# Altium PCB driver-FPGA.PcbDoc
Units mm, origin at the board's own origin, x right, y up, seen from the top; angles counter-clockwise.
Board outline 152.4 x 101.6 mm, 2 copper layers (Top Layer, Bottom Layer); 44 components, 27 nets, 144 pads, 54 vias.
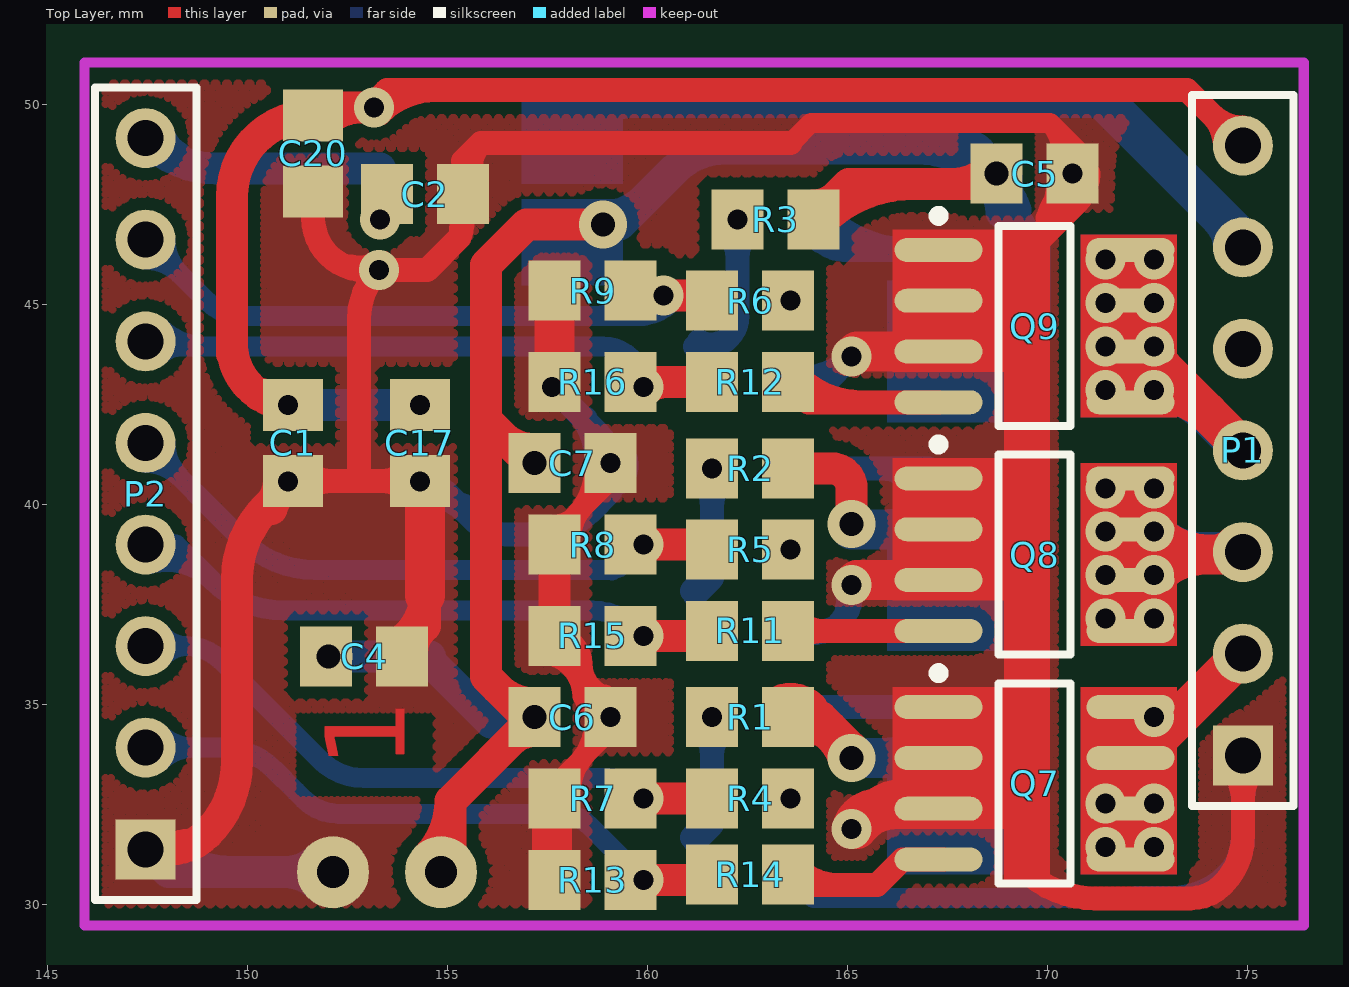
[diagram p0: Top Layer view]
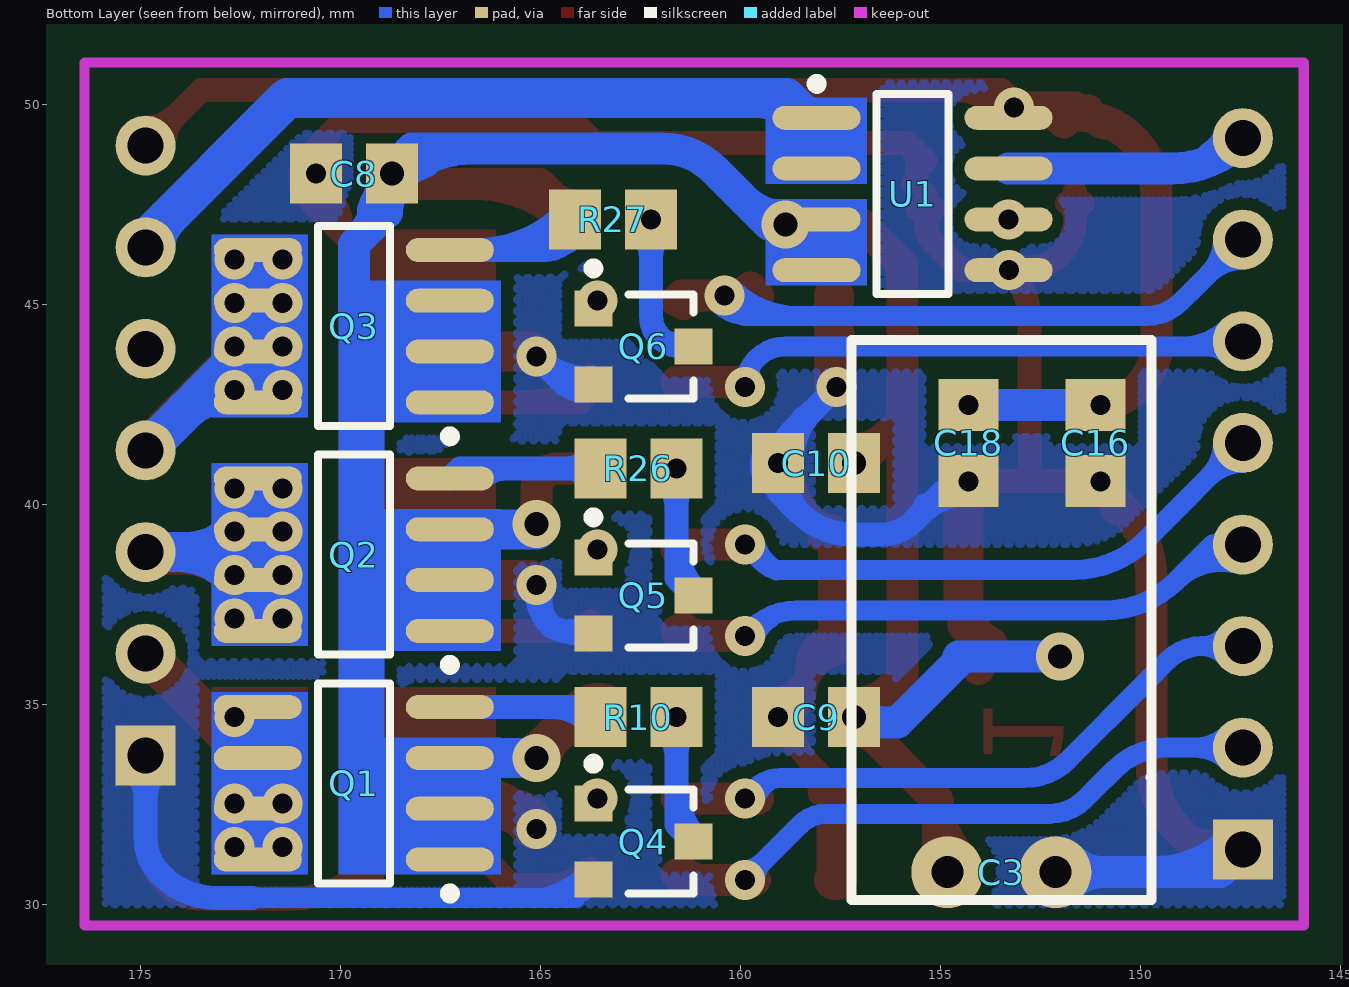
[diagram p1: Bottom Layer view, seen from below]

## Layer stack, top to bottom
Top Layer: signal copper 0.0356
Dielectric: dielectric 0.32, FR-4, Dk 4.8
Bottom Layer: signal copper 0.0356

## Board outline
25.4,25.4 177.8,25.4 177.8,127 25.4,127

## Design rules (kind name [scope] priority, off if disabled: settings)
Clearance Clearance_1 [InPolygon] p1: gap=0.3
Clearance [All] p2: gap=0.2
PolygonConnect [All] p1: connectstyle=Direct reliefconductorwidth=0.254 reliefentries=4 polygonreliefangle="90 Angle" airgapwidth=0.254
RoutingVias [All] p1: holewidth=0.5 width=1 viastyle="Through Hole" minholewidth=0.5 minwidth=1 maxholewidth=0.6 maxwidth=1.2
SolderMaskExpansion [All] p1: expansion=0.102
Width [All] p1: maxlimit=2 minlimit=0.2 preferedwidth=0.6 minimp=50.000000 maximp=50.000000 favimp=50.000000
28 further rules are at their usual default settings.

## Components (designator, comment, footprint, x,y, rotation, side; value= is the part's Value field where it differs from the comment)
C1 "Cap_UP" 2012[0805] 151.13,41.529 r270 top
C2 "Cap_UP" 2012[0805] 154.432,47.752 r0 top
C3 "Cap_El_200V" Cap1000u-16 149.733,30.099 r90 bottom locked
C4 "Cap_UP" 2012[0805] 152.908,36.195 r180 top
C5 "Cap_UP" 2012[0805] 169.672,48.26 r180 top
C6 "Cap_UP" 2012[0805] 158.115,34.671 r180 top
C7 "Cap_UP" 2012[0805] 158.115,41.021 r180 top
C8 "Cap_UP" 2012[0805] 169.672,48.26 r180 bottom
C9 "Cap_UP" 2012[0805] 158.115,34.671 r180 bottom
C10 "Cap_UP" 2012[0805] 158.115,41.021 r180 bottom
C16 "Cap_UP" 2012[0805] 151.13,41.529 r90 bottom
C17 "Cap_UP" 2012[0805] 154.305,41.529 r90 top
C18 "Cap_UP" 2012[0805] 154.305,41.529 r90 bottom
C20 "Cap_UP" 2012[0805] 151.638,48.768 r90 top
P1 "Header 7" HDR1X7 174.879,33.72 r90 top
P2 "Header 8" HDR1X8 147.447,31.369 r90 top
Q1 "MOSFET-P-8PIN" SO-8_N 169.672,33.02 r0 bottom
Q2 "MOSFET-P-8PIN" SO-8_N 169.672,38.735 r0 bottom
Q3 "MOSFET-P-8PIN" SO-8_N 169.672,44.45 r0 bottom
Q4 "2N2222" SOT-23 162.435,31.56 r270 bottom
Q5 "2N2222" SOT-23 162.433,37.719 r270 bottom
Q6 "2N2222" SOT-23 162.433,43.942 r270 bottom
Q7 "MOSFET-N-8PIN" SO-8_N 169.672,33.02 r0 top
Q8 "MOSFET-N-8PIN" SO-8_N 169.672,38.735 r0 top
Q9 "MOSFET-N-8PIN" SO-8_N 169.672,44.45 r0 top
R1 "Res" 2012[0805] 162.56,34.671 r0 top
R2 "Res" 2012[0805] 162.56,40.894 r0 top
R3 "Res" 2012[0805] 163.195,47.117 r0 top
R4 "Res" 2012[0805] 162.56,32.639 r180 top
R5 "Res" 2012[0805] 162.56,38.862 r180 top
R6 "Res" 2012[0805] 162.56,45.085 r180 top
R7 "Res" 2012[0805] 158.623,32.639 r0 top
R8 "Res" 2012[0805] 158.623,38.989 r0 top
R9 "Res" 2012[0805] 158.623,45.339 r0 top
R10 "Res" 2012[0805] 162.56,34.671 r0 bottom
R11 "Res" 2012[0805] 162.56,36.83 r0 top
R12 "Res" 2012[0805] 162.56,43.053 r0 top
R13 "Res" 2012[0805] 158.623,30.607 r0 top
R14 "Res" 2012[0805] 162.56,30.734 r0 top
R15 "Res" 2012[0805] 158.623,36.703 r0 top
R16 "Res" 2012[0805] 158.623,43.053 r0 top
R26 "Res" 2012[0805] 162.56,40.894 r0 bottom
R27 "Res" 2012[0805] 163.195,47.117 r0 bottom
U1 "ACS712" "8 pin SOIC_N" 155.702,47.752 r180 bottom

## Footprints (in the part's own frame and the unit in brackets; to place one, negate y for a bottom-side part, rotate by r counter-clockwise, add the part's x,y. Pads: shape width x height; smd on the part's side, far side on the other; paste and mask are expansions set on the pad)
"8 pin SOIC_N" [mm] "8-Pin Small Outline Integrated Circuit 1.27 mm Pitch, IPC Medium Density"
  oval 2.2x0.6 smd: 1(-2.4,1.905) 2(-2.4,0.635) 3(-2.4,-0.635) 4(-2.4,-1.905) 5(2.4,-1.905) 6(2.4,-0.635) 7(2.4,0.635) 8(2.4,1.905)
  silkscreen extent -2.53,-2.5 0.9,2.88, body extent -1.95,-2.45 1.95,2.45, height 1.91
2012[0805] [mm] "Chip Resistor; Body 2.0 x 1.3 mm (LxW typ)"
  rect 1.3x1.5 smd: 1(-0.95,0) 2(0.95,0)
  body extent -1.22,-0.75 1.28,0.75, height 0.5
Cap1000u-16 [mm] "Capacitor, SM Tantalum; Body 7.3 x 4.3 mm (LxW typ)"
  round 1.8 hole 0.8: 1(0.7,2.4) 2(0.7,5.1)
  silkscreen extent 0,0 14,7.5
HDR1X7 [mm]
  rect 1.5x1.5 hole 0.9: 1(0,0)
  round 1.5 hole 0.9: 2(2.54,0) 3(5.08,0) 4(7.62,0) 5(10.16,0) 6(12.7,0) 7(15.24,0)
  silkscreen extent -1.27,-1.27 16.51,1.27
HDR1X8 [mm]
  rect 1.5x1.5 hole 0.9: 1(0,0)
  round 1.5 hole 0.9: 2(2.54,0) 3(5.08,0) 4(7.62,0) 5(10.16,0) 6(12.7,0) 7(15.24,0) 8(17.78,0)
  silkscreen extent -1.27,-1.27 19.05,1.27
SO-8_N [mm] "8-Pin Small Outline Integrated Circuit 1.27 mm Pitch, IPC Medium Density"
  oval 2.2x0.6 smd: 1(-2.4,1.905) 2(-2.4,0.635) 3(-2.4,-0.635) 4(-2.4,-1.905) 5(2.4,-1.905) 6(2.4,-0.635) 7(2.4,0.635) 8(2.4,1.905)
  silkscreen extent -2.52,-2.5 0.9,2.88, body extent -1.95,-2.45 1.95,2.45, height 1.75
SOT-23 [mm] "SOT-23; 3 Leads; Body 3.0 x 2.6 mm, inc. leads (LxW max)"
  rect 0.9x0.95 smd: 1(0,1.25) 2(-0.95,-1.25) 3(0.95,-1.25)
  silkscreen extent -2.07,-1.38 1.3,1.25, body extent -1.33,-0.38 1.33,1.25, height 2

## Part data
C1 C2 C3 C4 C5 C6 C7 C8 C9 C10 C16 C17 C18 C20: "Capacitor"
P1: "Header, 7-Pin"
P2: "Header, 8-Pin"
Q1 Q2 Q3: "P-Channel MOSFET"
Q4 Q5 Q6: "NPN Bipolar Transistor"
Q7 Q8 Q9: "N-Channel MOSFET"
R1 R2 R3 R4 R5 R6 R7 R8 R9 R10 R11 R12 R13 R14 R15 R16 R26 R27: "Semiconductor Resistor"

## Via types
v1: diameter 1, hole 0.5, Top Layer to Bottom Layer, 47 vias
v2: diameter 1.2, hole 0.6, Top Layer to Bottom Layer, 7 vias

## Nets (pads, with @x,y where several pads share a name; then routed paths per layer and width w, separated by ;. In a path a pad name is that pad's centre, name@x,y a point inside that pad or via, vN(x,y) a via of type N, cw(c..) or ccw(c..) an arc to the next point about the centre after c; other vN are vias at no path point)
AGND: C1.2 C2.2 C3.1 C4.1 C5.1 C6.1 C7.1 C8.1 C9.1 C10.1 C16.1 C17.1 C18.1 C20.1 P1.1 P2.1 Q4.3 Q5.3 Q6.3 Q7.1 Q7.2 Q7.3 Q8.1 Q8.2 Q8.3 Q9.1 Q9.2 Q9.3 R7.1 R8.1 R9.1 R13.1 R15.1 R16.1 U1.5 | length 178.2
  Top Layer w0.5: R15.1@157.572,36.216 cw(c157.303,35.185) 158.369,35.185 ; R7.1 157.673,32.959 C6.1@159.065,34.351 ; R15.1 cw(c157.673,36.007) 158.369,36.007 ; R8.1@157.673,39.202 C7.1@159.065,40.594 ; R8.1@157.673,39.489 ccw(c157.673,40.182) R8.1@158.163,39.692 ; R15.1@157.698,36.7 cw(c157.472,35.832) 158.369,35.832 ; R7.1@158.073,32.739 cw(c159.57,32.739) 158.511,33.797 ; R8.1@158.073,39.089 cw(c159.311,39.089) 158.436,39.964 ; R8.1@158.151,39.68 ccw(c156.909,40.921) C7.1@158.665,40.921 ; 158.227,33.513 ccw(c157.168,34.571) C6.1@158.665,34.571 ; 158.336,39.865 ccw(c157.18,41.021) C7.1@158.815,41.021 ; 158.369,35.443 ccw(c159.146,35.443) C6.1@159.053,34.672 ; 158.412,33.698 ccw(c157.439,34.671) C6.1@158.815,34.671 ; C6.1@158.929,35.242 cw(c158.7,34.671) C6.1@159.315,34.671 ; v1(159.065,34.671) cw(c159.065,35.367) 158.369,35.367 158.369,36.007 ; C6.1@159.113,35.168 cw(c159.214,36.007) 158.369,36.007 ; 163.576,49.022 164.084,49.53 170.053,49.53 ; C5.1@170.253,48.514 ccw(c169.396,48.873) 170.053,49.53 ; 170.329,49.071 ccw(c170.849,49.001) C5.1@170.695,48.499 ; C5.1@170.38,48.323 ccw(c169.164,48.641) 170.053,49.53 ; C5.1@170.67,48.913 cw(c170.142,48.386) C5.1@170.864,48.197 ; C5.1@170.749,48.834 170.053,49.53
  Top Layer w0.6: C1.2 152.654,40.579 ; C1.2@151.144,40.425 cw(c151.517,40.052) C1.2@151.517,40.579 ; C20.1@151.438,47.531 cw(c151.171,47.148) 151.638,47.148 ; C1.2@151.477,40.332 cw(c152.075,39.734) 152.075,40.579 cw(c152.075,41.424) C1.2@151.477,40.826 ; C20.1 151.638,47.148 ; C20.1@151.838,47.531 ccw(c152.105,47.148) 151.638,47.148 ; 152.588,45.941 ccw(c152.793,46.706) v1@153.189,46.02 ; C17.1@153.791,40.579 cw(c153.791,40.052) C17.1@154.164,40.425 ; C17.1@153.958,40.332 ccw(c153.36,39.734) 153.36,40.579 ccw(c153.36,41.424) C17.1@153.958,40.826 ; C17.1@154.432,40.566 ccw(c154.401,40.535) 154.401,40.579 C17.1 152.654,40.579 ; C2.2@155.155,47.386 cw(c154.808,46.98) 155.334,46.89 ; 155.353,47.001 cw(c155.909,46.905) C2.2@155.584,47.366 ; C2.2 155.382,47.168 cw(c153.873,47.168) 155.294,46.662 154.48,45.847 v1(153.289,45.847) ; 155.382,48.575 155.829,49.022 ; C2.2@155.688,48.022 cw(c156.423,48.428) 155.829,49.022 ; 163.576,49.022 155.829,49.022 ; 169.291,30.988 169.39,30.889 ccw(c171.186,32.685) 171.186,30.145 173.562,30.145 ccw(c173.562,31.289) 174.371,30.48 ccw(c173.145,31.706) 174.879,31.706 P1.1 ; 169.418,46.228 170.749,47.559 C5.1@170.749,48.26 ; 169.51,46.32 ccw(c167.669,48.16) C5.1@170.272,48.16 ; 169.695,46.505 ccw(c167.94,48.26) C5.1@170.422,48.26 ; 170,47.146 cw(c171.496,46.746) C5.1@170.722,48.087 ; C5.1@170.492,48.108 cw(c170.01,47.548) C5.1@170.749,47.548 ; 170.534,47.344 ccw(c169.718,48.16) C5.1@170.872,48.16 ; v1(170.622,48.26) C5.1@170.622,48.834 ; C5.1@170.719,47.529 ccw(c169.989,48.26) C5.1@171.022,48.26 ; P1.1@174.561,33.402 cw(c173.793,32.634) 174.879,32.634 cw(c175.965,32.634) P1.1@175.197,33.402 ; 151.638,47.148 ccw(c152.939,47.148) 152.019,46.228 ccw(c152.939,47.148) 152.939,45.847 v1(153.289,45.847) ; 152.654,40.579 ccw(c152.347,40.886) 152.781,40.886 152.781,44.621 cw(c154.515,44.621) v1(153.289,45.847)
  Top Layer w0.8: P2.1 148.051,31.369 ccw(c148.051,32.67) 148.971,31.75 148.989,31.768 ccw(c147.193,33.564) 149.733,33.564 149.733,38.13 cw(c152.273,38.13) 150.477,39.926 C1.2 ; P2.1@147.669,31.64 ccw(c148.217,32.307) 148.44,31.473 ; C1.2@150.533,39.982 ccw(c149.935,40.579) C1.2@150.78,40.579 ; 150.593,39.879 cw(c151.547,39.623) C1.2@151.053,40.479 ; C4.1@153.733,36.512 ccw(c153.04,37.719) 154.432,37.719 154.432,36.957 153.858,36.383 C4.1 ; C4.1@154.051,35.875 C4.1@154.051,36.388 ; C4.1@154.108,36.295 cw(c154.924,36.295) C4.1@154.347,36.872 ; R15.1 R8.1
  Top Layer w1: 154.432,37.719 C17.1@154.432,40.566 ; R7.1@157.607,32.573 157.607,30.607 R13.1 ; R16.1 R9.1@157.673,45.212 ; v1(165.1,37.973) 165.227,38.1 Q8.3 ; v1(165.1,43.688) 165.227,43.815 Q9.3 ; v1@165.227,31.877 165.651,32.301 ; Q7.3@166.326,32.385 ccw(c166.326,30.651) v1(165.1,31.877) ; Q7.3@166.499,32.583 ccw(c166.364,31.598) 165.661,32.301 ; Q7.3@166.533,32.575 ccw(c166.295,31.835) 165.745,32.385 ; Q7.3 165.745,32.385 ; v1(165.1,31.877) cw(c165.745,31.722) 165.745,32.385 ; v1(165.1,31.877) cw(c165.651,31.731) 165.651,32.301 ; v1(165.1,31.877) cw(c165.661,31.718) 165.661,32.301 ; 165.651,32.301 165.661,32.301 ; 165.661,32.301 165.745,32.385
  Bottom Layer w0.4: Q4.3@163.604,30.504 ccw(c164.45,31.35) 164.45,30.153 ; Q4.3 164.142,30.153 cw(c164.58,30.592) Q4.3@163.96,30.604 ; Q4.3@163.71,30.36 cw(c163.71,29.816) Q4.3@164.094,30.201 ; Q4.3@163.887,30.786 ccw(c165.416,32.315) 165.416,30.153
  Bottom Layer w0.5: 164.142,30.153 172.212,30.153
  Bottom Layer w0.6: C18.1@154.305,40.366 cw(c154.305,38.963) 155.297,39.955 ; v1(154.305,40.566) cw(c154.305,39.646) C18.1@154.955,40.297 ; C18.1@154.395,40.387 cw(c154.612,39.953) C18.1@154.955,40.297 ; C18.1@154.405,40.229 cw(c154.405,38.737) 155.46,39.792 ; C18.1@154.478,40.666 ccw(c155.782,41.419) 155.393,39.964 ; v1(157.607,42.926) 158.749,41.784 ; 158.222,42.311 cw(c157.032,41.121) C10.1@158.715,41.121 ; 158.443,42.135 ccw(c159.939,42.535) C10.1@159.165,41.194 ; C10.1@158.741,40.789 cw(c157.882,40.44) 158.538,39.785 ccw(c157.647,40.675) C10.1@158.871,40.974 ; C10.1@158.783,41.329 ccw(c158.501,41.536) 158.749,41.784 ; C10.1@158.805,40.274 cw(c159.332,40.34) C10.1@159.138,40.835 ; C10.1@159.292,40.539 ccw(c158.86,40.971) C10.1@159.454,41.116 ; Q5.3 164.033,36.769 ccw(c164.033,38.278) 164.728,36.939 ccw(c163.831,37.836) 165.1,37.836 v1(165.1,37.973) ; Q6.3 164.404,42.992 v1(165.1,43.688) cw(c163.779,45.009) Q6.3@163.713,43.142 ; Q5.3@163.786,36.897 ccw(c164.111,37.432) 164.259,36.824 ; Q6.3@163.906,42.822 ccw(c163.926,43.404) 164.338,42.992 ; v1@164.927,37.873 cw(c164.404,37.571) 164.987,37.415 ; 172.212,30.153 173.095,30.153 ccw(c173.095,32.137) 174.498,30.734 ccw(c173.578,31.654) 174.879,31.654 P1.1 ; P1.1@174.561,33.402 cw(c173.793,32.634) 174.879,32.634 cw(c175.965,32.634) P1.1@175.197,33.402 ; C18.1@154.955,40.297 155.687,39.565 ccw(c156.464,40.341) 156.464,39.243 157.23,39.243 ccw(c157.23,41.092) 158.538,39.785 159.065,40.312 v1(159.065,41.021) ccw(c157.986,41.021) 158.749,41.784
  Bottom Layer w0.8: P2.1 148.017,30.799 C3.1 ; P2.1@147.694,31.616 ccw(c149.668,33.59) 149.668,30.799 ; C3.1@151.779,30.445 ccw(c150.926,29.592) 150.926,30.799 ccw(c150.926,32.006) C3.1@151.779,31.153
  other v1: 151.003,40.566
M1N: P2.6 R12.1 R16.2 | length 17.9
  Top Layer w0.8: R16.2@159.893,43.053 R12.1 ; R16.2@159.964,42.855 cw(c160.441,42.378) 160.441,43.053
  Bottom Layer w0.5: P2.6@147.447,43.942 158.877,43.942 cw(c158.877,42.926) v1(159.893,42.926) ; P2.6@147.801,43.715 cw(c148.347,43.169) 148.347,43.942 ; P2.6@147.801,44.423 ccw(c148.961,45.583) 148.961,43.942 ; v1@159.69,43.072 ccw(c159.343,43.323) 159.757,43.434 ccw(c160.17,43.545) v1@159.995,43.154
M1P: P2.7 R6.2 R9.2 | length 23.7
  Top Layer w0.8: R9.2@159.573,45.212 v1(160.401,45.212) 161.483,45.212 R6.2 ; 160.941,45.212 cw(c160.941,44.516) R6.2@161.433,45.008 ; R9.2@159.75,45.416 ccw(c160.242,45.908) v1@160.242,45.212 ; R9.2@159.75,45.416 ccw(c160.242,45.908) v1@160.242,45.212 ; R9.2@159.75,45.416 ccw(c160.242,45.908) v1@160.242,45.212
  Bottom Layer w0.5: P2.7@147.447,46.109 cw(c147.447,44.902) 148.301,45.755 cw(c149.154,46.609) P2.7@147.947,46.609 ; P2.7 148.59,45.466 148.993,45.063 ; 148.993,45.063 ccw(c149.86,45.93) 149.86,44.704 159.893,44.704 v1(160.401,45.212) ; 158.571,44.704 ccw(c158.571,47.042) v1@160.224,45.389 ; 159.778,44.704 ccw(c159.778,45.835) v1@160.578,45.035 ; v1@160.151,45.212 cw(c159.547,45.212) 159.974,44.785 cw(c160.401,44.358) v1@160.401,44.962
M2N: P2.4 R11.1 R15.2 | length 19.8
  Top Layer w0.8: v1(159.893,36.703) 161.483,36.703 R11.1 ; 160.941,36.703 ccw(c160.941,37.399) R11.1@161.433,36.907
  Bottom Layer w0.5: P2.4@147.571,38.505 cw(c147.973,36.939) 149.116,38.082 ; P2.4@147.906,38.79 cw(c148.209,38.658) 148.209,38.989 ; P2.4@147.906,39.188 ccw(c148.209,39.32) 148.209,38.989 ; 148.496,38.702 ccw(c147.72,37.926) P2.4 148.209,38.989 ; 159.262,37.146 cw(c158.844,36.422) v1@159.652,36.638 ; v1(159.893,36.703) 159.707,36.889 ccw(c158.623,35.805) 158.623,37.338 150.912,37.338 cw(c150.912,39.878) 149.116,38.082 ; 148.209,38.989 149.116,38.082
M2P: P2.5 R5.2 R8.2 | length 19
  Top Layer w0.8: v1(159.893,38.989) 161.483,38.989 R5.2 ; 160.941,38.989 cw(c160.941,38.293) R5.2@161.433,38.785
  Bottom Layer w0.5: P2.5@147.447,41.029 cw(c147.447,39.822) 148.301,40.675 cw(c149.154,41.529) P2.5@147.947,41.529 ; P2.5 149.878,39.098 ccw(c151.674,40.894) 151.674,38.354 159.004,38.354 ccw(c159.004,38.967) 159.438,38.534 v1(159.893,38.989) ; 159.105,38.342 ccw(c158.519,39.357) v1@159.652,39.054
M3N: P2.2 R13.2 R14.1 | length 19.1
  Top Layer w0.8: R13.2@159.639,30.607 v1(159.893,30.607) 161.483,30.607 R14.1 ; 160.941,30.607 ccw(c160.941,31.303) R14.1@161.433,30.811
  Bottom Layer w0.5: P2.2 149.352,33.909 cw(c149.352,32.069) 150.653,33.37 151.209,32.814 151.406,32.617 ; P2.2@147.801,33.555 cw(c148.654,32.702) 148.654,33.909 cw(c148.654,35.116) P2.2@147.801,34.263 ; 151.406,32.617 ccw(c152.273,33.484) 152.273,32.258 157.861,32.258 cw(c157.861,31.338) 158.511,31.989 v1(159.893,30.607) ; v1@159.643,30.607 ccw(c159.039,30.607) 159.466,31.034 ccw(c159.893,31.461) v1@159.893,30.857
M3P: P2.3 R4.2 R7.2 | length 18
  Top Layer w0.8: R7.2 v1(159.893,32.639) R4.2
  Bottom Layer w0.5: P2.3 148.463,36.449 ; P2.3@147.843,36.144 cw(c148.463,35.667) 148.463,36.449 ; P2.3@147.843,36.754 ccw(c148.463,37.231) 148.463,36.449 ; 149.33,36.09 ccw(c148.463,35.223) 148.463,36.449 ; 149.33,36.09 149.86,35.56 151.828,33.591 ; 151.829,33.591 ccw(c152.902,34.665) 152.902,33.147 159.004,33.147 cw(c159.004,32.227) 159.654,32.878 v1(159.893,32.639) ; 159.231,33.122 cw(c158.781,32.341) v1@159.652,32.574
NetC2_1: C2.1 U1.6
  other v1: 153.302,47.117
NetQ1_4: Q1.4 R10.2 | length 4.9
  Bottom Layer w0.6: R10.2 cw(c164.123,34.058) 164.123,34.925 Q1.4 ; R10.2@163.757,34.524 cw(c164.727,33.554) 164.727,34.925
NetQ2_4: Q2.4 R26.2 | length 5.6
  Bottom Layer w0.6: R26.2@163.757,40.647 cw(c164.355,40.049) 164.355,40.894 cw(c164.355,41.739) R26.2@163.757,41.141 ; R26.2@163.764,40.894 167.018,40.894 Q2.4 ; 165.859,40.894 cw(c165.859,40.027) Q2.4@166.472,40.64
NetQ3_4: Q3.4 R27.2 | length 7.3
  Bottom Layer w0.6: R27.2@163.968,46.84 ccw(c165.14,48.012) 165.14,46.355 ; R27.2 ccw(c164.907,47.117) 164.907,46.355 Q3.4 ; R27.2@164.393,47.264 ccw(c166.588,49.46) Q3.4@166.588,46.355
NetQ4_1: Q4.1 R1.1 R10.1 | length 6
  Bottom Layer w0.6: Q4.1@161.104,31.666 ccw(c159.882,32.887) 161.61,32.887 ; Q4.1 161.61,31.985 v1(161.61,34.671) ; R10.1@161.363,34.324 cw(c160.765,33.726) 161.61,33.726 cw(c162.455,33.726) R10.1@161.857,34.324
NetQ4_2: Q4.2 R4.1
  other v1: 163.576,32.639
NetQ5_1: Q5.1 R2.1 R26.1 | length 6
  Bottom Layer w0.6: Q5.1@161.102,37.825 ccw(c159.875,39.052) 161.61,39.052 ; Q5.1 161.61,38.146 v1(161.61,40.894) ; R26.1@161.363,40.547 cw(c160.765,39.949) 161.61,39.949 cw(c162.455,39.949) R26.1@161.857,40.547
NetQ5_2: Q5.2 R5.1
  other v1: 163.576,38.862
NetQ6_1: Q6.1 R3.1 R27.1 | length 5.7
  Bottom Layer w0.6: Q6.1 161.483,43.942 ccw(c161.483,44.704) 162.245,44.704 v1(162.245,47.117) ; Q6.1@161.283,44.072 ccw(c161.586,44.596) 161.742,44.011 ; R27.1@161.998,46.77 cw(c161.4,46.172) 162.245,46.172 cw(c163.09,46.172) R27.1@162.493,46.77
NetQ6_2: Q6.2 R6.1
  other v1: 163.576,45.085
NetQ7_4: Q7.4 R14.2 | length 5.3
  Top Layer w0.6: R14.2 163.764,30.48 165.735,30.48 166.37,31.115 Q7.4@167.386,31.115 ; R14.2@163.757,30.881 ccw(c164.727,31.851) 164.727,30.48
NetQ8_4: Q8.4 R11.2 | length 4.7
  Top Layer w0.6: R11.2@163.757,36.583 cw(c164.355,35.985) 164.355,36.83 cw(c164.355,37.675) R11.2@163.757,37.077 ; R11.2@163.937,36.83 Q8.4
NetQ9_4: Q9.4 R12.2 | length 5.7
  Top Layer w0.6: R12.2 164.018,42.545 Q9.4 ; R12.2@163.757,43.2 ccw(c165.34,44.783) 165.34,42.545
PHASEA: P1.4 Q3.5 Q3.6 Q3.7 Q3.8 Q9.5 Q9.6 Q9.7 Q9.8 | length 25.4
  Top Layer w1: v1(171.45,42.858) ccw(c171.816,43.372) 172.263,42.926 172.009,42.672 cw(c172.501,42.18) v1(172.657,42.858) ; Q9.6@171.831,43.815 Q9.6 Q9.6@172.466,43.815 ; v1(172.657,43.942) ccw(c173.424,43.942) 172.882,43.399 ; Q9.6@172.672,43.815 ccw(c173.169,43.815) 172.818,43.463 ; Q9.5@172.848,42.718 ccw(c172.111,41.912) v1(172.657,42.858) ; Q9.5@172.872,42.745 cw(c172.872,41.142) 174.006,42.275 ; 173.964,42.317 ccw(c172.657,41.009) v1(172.657,42.858) ; P1.4@174.879,41.402 Q9.6@172.466,43.815 ; Q9.6@172.466,43.815 cw(c171.845,43.194) v1(172.657,42.858)
  Bottom Layer w1: Q3.7@172.213,43.674 ccw(c171.91,43.977) Q3.7@172.339,43.977 ; v1@172.339,44.323 Q3.7@172.339,43.88 ; Q3.7@172.672,43.815 ccw(c173.319,43.815) 172.862,43.357 ; Q3.7@172.679,43.867 ccw(c173.257,43.712) 172.739,43.413 ; 172.723,43.44 cw(c173.296,43.771) v1(172.657,43.942) ccw(c173.574,43.942) 172.925,43.294 ; 172.862,43.357 ccw(c171.45,41.945) v1(171.45,43.942) cw(c171.859,43.4) Q3.7@172.339,43.88 ; Q3.8@172.872,42.745 cw(c172.872,41.292) 173.9,42.319 ; 173.858,42.361 ccw(c172.657,41.159) v1(172.657,42.858) ccw(c171.526,43.067) Q3.7@172.339,43.88 ; P1.4 Q3.7@172.339,43.88 ; v1@172.339,44.258 cw(c173.424,44.258) v1(172.657,45.026) ccw(c173.424,44.258) v1@172.339,44.258
  other v1: 171.45,45.026 171.45,46.109 172.657,46.109
PHASEB: P1.3 Q2.5 Q2.6 Q2.7 Q2.8 Q8.5 Q8.6 Q8.7 Q8.8 | length 33.1
  Top Layer w1: 171.43,38.735 cw(c171.43,37.001) v1(172.657,38.227) cw(c173.883,37.001) 173.883,38.735 ; v1@172.323,38.406 ccw(c171.994,37.793) v1(171.45,38.227) cw(c172.676,37.001) 172.676,38.735 ; Q8.7@172.401,39.148 cw(c172.015,39.754) v1(171.45,39.311) ccw(c172.84,40.701) 172.84,38.735 ; Q8.6@172.731,38.241 cw(c173.922,37.05) 173.922,38.735 cw(c173.922,40.42) Q8.7@172.731,39.229 ; 174.047,38.735 cw(c174.047,40.701) v1(172.657,39.311) cw(c171.323,40.568) 171.323,38.735 P1.3@174.879,38.735 ; 174.119,38.735 ccw(c174.119,39.56) P1.3@174.702,38.977
  Bottom Layer w1: Q2.7@171.69,38.307 cw(c172.277,38.204) 172.277,38.8 ; Q2.6@172.214,39.511 cw(c171.823,39.124) 172.212,38.735 172.277,38.8 ; v1(172.657,38.227) cw(c174.04,36.844) 174.04,38.8 ; v1(172.657,39.311) ccw(c173.89,40.544) 173.89,38.8 ; Q2.7@172.675,38.134 cw(c173.467,37.996) 173.467,38.8 cw(c173.467,39.663) Q2.6@172.693,39.282 ; 172.683,38.8 cw(c172.683,40.544) v1(171.45,39.311) ccw(c172.277,39.725) 172.277,38.8 ; Q2.7@172.731,38.241 cw(c174.079,36.893) 174.079,38.8 ; Q2.6@172.731,39.229 ccw(c173.765,40.263) 173.765,38.8 ; P1.3 172.277,38.8 ; Q2.7@171.872,38.1 cw(c172.584,38.1) 172.081,38.604 ccw(c172.584,38.1) Q2.7@171.872,38.1
  other v1: 171.45,37.143 172.657,37.143 171.45,40.394 172.657,40.394
PHASEC: P1.2 Q1.5 Q1.6 Q1.7 Q1.8 Q7.5 Q7.6 Q7.7 Q7.8 | length 7.4
  Top Layer w1: Q7.7@171.873,33.677 cw(c172.831,33.573) 172.263,34.351 ; Q7.7@171.888,33.577 cw(c172.37,33.781) 172.062,34.204 ; 171.945,34.119 172.738,34.119 P1.2
  Bottom Layer w1: v1(171.45,32.512) ccw(c170.866,33.523) 171.994,33.221 ; Q1.6@172.222,33.629 ccw(c171.171,34.679) v1(172.657,34.679)
  other v1: 171.45,31.428 172.657,31.428 172.657,32.512
VCC: C1.1 C16.2 C17.2 C18.2 C20.2 P1.7 U1.8 | length 42.8
  Top Layer w0.6: v1@153.162,50.038 153.48,50.356 ; v1@153.303,49.77 cw(c154.719,48.354) 154.719,50.356 ; v1@153.358,49.951 cw(c153.796,50.04) 153.48,50.356 ; P1.7@174.429,48.96 ccw(c173.343,48.96) 174.111,49.728 ccw(c174.879,50.496) P1.7@174.879,49.41 ; P1.7 173.483,50.356 153.48,50.356
  Top Layer w0.8: 149.606,43.749 149.606,47.686 cw(c151.638,47.686) C20.2 ; 149.606,44.003 ccw(c151.13,44.003) 149.632,43.723 ccw(c151.13,44.003) 150.85,42.505 ccw(c151.13,44.003) C1.1 ; 150.344,42.747 ccw(c150.685,43.459) C1.1@150.947,42.715 ; C20.2@150.901,49.521 ccw(c150.722,50.189) C20.2@151.321,49.843 ; C20.2@151.638,49.911 v1(153.162,49.911) ; C20.2@151.915,49.541 cw(c152.807,48.649) v1@152.807,49.911
  Bottom Layer w0.8: v1(151.003,42.479) C16.2 v1(154.305,42.479) C18.2@154.432,42.479
VDD: C3.2 C4.2 C5.2 C6.2 C7.2 C8.2 C9.2 C10.2 Q1.1 Q1.2 Q1.3 Q2.1 Q2.2 Q2.3 Q3.1 Q3.2 Q3.3 R1.2 R2.2 R3.2 U1.3 U1.4 | length 87.7
  Top Layer w0.8: C4.2@151.831,36.195 C4.2@152.019,36.007 ; C3.2@154.479,31.153 ccw(c153.061,32.571) 155.067,32.571 ; C3.2 155.067,31.033 155.067,32.573 C6.2@157.068,34.575 ; 156.238,35.405 ccw(c157.165,36.332) C6.2@157.165,35.021 ; 156.351,41.708 ccw(c157.165,42.523) C7.2@157.165,41.371 ; 156.494,35.149 ccw(c157.165,35.82) C6.2@157.165,34.871 ; C6.2@156.568,34.074 cw(c157.165,33.476) C6.2@157.165,34.321 ; C7.2@156.607,41.452 ccw(c157.165,42.01) C7.2@157.165,41.221 ; C7.2@157.038,41.021 155.956,42.103 ; v2(157.165,34.671) C6.2@157.068,34.575 ; v2(158.877,46.99) 156.972,46.99 155.956,45.974 155.956,42.103 ; R1.2@163.374,35.104 cw(c163.564,34.361) R1.2@164.106,34.903 ; R1.2 164.338,34.671 v2@165.1,33.909 ; R2.2 164.592,40.894 cw(c164.592,40.386) 165.1,40.386 v2(165.1,39.497) ; R1.2@163.572,34.329 cw(c163.967,32.776) v2@165.1,33.909 ; R3.2 165.034,48.006 168.595,48.006 C5.2@168.849,48.26 ; R3.2@164.145,47.467 ccw(c164.145,48.312) R3.2@164.742,47.714 ; R3.2@164.322,47.04 cw(c166.653,44.709) 166.653,48.006 ; 164.332,34.352 cw(c163.715,33.284) v2@164.907,33.603 ; 164.579,34.43 cw(c163.804,33.655) v2@164.9,33.655 ; v2(165.1,33.655) v2@165.1,33.909 ; 167.626,48.006 ccw(c167.626,49.356) C5.2@168.581,48.401 ; 167.747,48.006 ccw(c167.747,49.135) C5.2@168.545,48.337 ; C5.2@168.116,48.089 cw(c168.367,47.655) C5.2@168.621,48.087 ; 155.956,42.103 155.956,35.687 C6.2@157.068,34.575
  Bottom Layer w0.8: v2(152.019,36.195) 154.559,36.195 ; 154.432,36.195 156.083,34.544 156.858,34.544 ccw(c156.858,34.978) v2(157.165,34.671) ; 156.376,34.544 ccw(c156.376,35.46) C9.2@157.024,34.812 ; 156.496,34.544 ccw(c156.496,35.24) C9.2@156.988,34.748 ; U1.3@158.877,47.19 ccw(c158.877,48.679) 159.93,47.626 ; U1.3@158.902,47.017 ccw(c158.902,48.028) 159.617,47.313 ; U1.3@159.094,47.08 cw(c158.877,47.297) v2(158.877,46.99) 159.294,46.99 160.655,48.351 cw(c161.968,47.038) 161.968,48.895 168.214,48.895 168.849,48.26 168.849,47.305 169.672,46.482 169.672,44.831 ; 166.706,48.895 cw(c166.706,46.244) 168.581,48.119 cw(c167.933,47.471) 168.849,47.471 ; 166.827,48.895 cw(c166.827,46.465) C8.2@168.545,48.183 ; 167.903,48.554 ccw(c168.408,49.43) C8.2@168.67,48.453 ; C8.2@168.291,48.818 cw(c167.733,48.26) C8.2@168.522,48.26 ; C8.2@168.552,47.977 cw(c167.92,47.296) 168.849,47.296 ; C8.2@168.622,48.087 cw(c168.013,47.031) 169.19,47.347 ; C8.2@168.922,48.26 ccw(c171.404,48.26) 169.649,46.505 ; C8.2@168.972,48.16 ccw(c171.333,48.16) 169.664,46.49
  Bottom Layer w1: v2(165.1,33.655) Q1.3 ; v2@165.1,39.37 Q2.3
  other v2: 157.165,41.021 168.722,48.26
VFB_MOTOR: P2.8 U1.7 | length 7.4
  Bottom Layer w0.8: P2.8 147.491,49.105 ccw(c149.225,50.84) 149.225,48.387 U1.7 ; P2.8@147.538,48.811 cw(c147.742,48.047) 148.137,48.732 ; P2.8@147.785,49.24 ccw(c148.654,49.472) 148.204,48.693
VMOTOR: P1.6 U1.1 U1.2 | length 21.1
  Bottom Layer w1: 158.052,49.34 158.868,50.156 ; U1.1@158.706,49.617 cw(c159.288,49.736) 158.868,50.156 ; U1.1@158.761,49.798 cw(c159.624,48.935) 159.624,50.156 ; 174.319,47.169 cw(c173.569,46.42) P1.6@174.629,46.42 ; P1.6@174.973,46.515 171.332,50.156 158.868,50.156
pads on no net: P1.5

## Polygon pours and split planes (outlines as drawn)
AGND on Bottom Layer "Top Layer-No Net 1" (hatched 45Degree grid 0.2 track 0.2, remove dead copper, pour order 2): 145.923,51.037 176.341,51.037 ccw(c176.341,51.099) 176.403,51.099 176.403,29.718 146.242,29.718 ccw(c146.242,29.399) 145.923,29.399 145.923,51.037
AGND on Top Layer "Top Layer-No Net 1" (hatched 45Degree grid 0.2 track 0.2, remove dead copper, pour order 4): 176.403,51.037 145.923,51.037 145.923,29.399 176.338,29.399 ccw(c176.338,29.464) 176.403,29.464 176.403,51.037

## Keep-outs
Keep-Out Layer:
  lines w0.254: 145.923,29.464 145.923,51.037 176.403,51.037 176.403,29.464 145.923,29.464

## Other copper
Top Layer:
  rectangle net PHASEA: 170.815,42.164 173.228,46.736
  rectangle net PHASEB: 170.815,36.449 173.228,41.021
  rectangle net PHASEC: 170.815,30.734 173.228,35.433
  rectangle net AGND: 166.116,43.307 170.053,46.863
  rectangle net AGND: 166.116,37.592 170.053,41.148
  rectangle net AGND: 166.116,31.877 170.053,35.433
  rectangle net AGND: 168.91,30.607 170.053,43.307
  pour cut-out: 176.149,50.8 171.958,50.8 174.135,50.782 ccw(c174.135,48.242) 171.595,48.242 171.577,47.371 169.418,47.371 cw(c169.418,46.609) 170.18,46.609 170.18,31.115 172.847,31.115 cw(c172.847,30.734) 173.228,30.734 173.355,30.734 ccw(c173.355,31.242) 173.863,31.242 173.863,34.544 ccw(c173.863,36.576) 175.895,36.576 175.895,36.703 ccw(c175.895,36.957) 176.149,36.957
  text "1" at 153.924,33.401 h2 r90
Bottom Layer:
  rectangle net VMOTOR: 156.845,48.006 159.385,50.165
  rectangle net PHASEA: 170.815,42.164 173.228,46.736
  rectangle net PHASEB: 170.815,36.449 173.228,41.021
  rectangle net PHASEC: 170.815,30.734 173.228,35.306
  rectangle net VDD: 165.989,42.037 170.053,45.593
  rectangle net VDD: 165.989,36.322 168.91,39.878
  rectangle net VDD: 165.989,30.734 168.91,34.163
  rectangle net VDD: 168.91,30.734 170.053,42.037
  rectangle net VDD: 156.845,45.466 159.385,47.625

## Silkscreen, mask and mechanical layers (free items; w line width, h text height)
Top Solder:
  rectangle: 166.116,31.877 169.164,35.433
  rectangle: 166.116,43.307 169.037,46.863
  rectangle: 166.116,37.592 169.037,41.148
  rectangle: 170.815,30.861 173.228,35.433
  rectangle: 170.815,36.449 173.228,41.021
  rectangle: 170.815,42.164 173.228,46.736
  rectangle: 168.91,31.877 170.053,46.863
  lines w1: 171.704,38.735 175.26,38.735 ; 172.466,43.815 174.879,41.402 ; 172.676,34.653 174.879,36.26
Bottom Solder:
  rectangle: 168.783,30.734 170.053,46.863
  rectangle: 156.845,48.006 159.385,50.165
  rectangle: 166.116,42.037 168.783,45.466
  rectangle: 166.116,30.734 168.783,34.036
  rectangle: 166.116,36.322 168.783,39.751
  rectangle: 170.815,30.734 173.228,35.433
  rectangle: 170.815,36.449 173.228,41.021
  rectangle: 170.815,42.164 173.228,46.736
  lines w0.8: 157.988,49.022 159.131,50.165 171.323,50.165 174.879,46.609 174.879,46.42 ; 159.258,46.99 158.877,46.99 ccw(c158.877,48.216) 159.744,47.349 160.931,48.536 cw(c161.798,47.669) 161.798,48.895 168.095,48.895 cw(c168.095,48.461) 168.402,48.768 cw(c167.482,47.848) 168.783,47.848 168.783,47.551 ccw(c169.217,47.551) 168.91,47.244 169.545,46.609 cw(c169.238,46.302) 169.672,46.302 169.672,34.417 cw(c166.606,34.417) 168.774,32.249 ccw(c168.752,32.227) 168.752,32.258 166.878,32.258 ; 166.497,38.227 169.672,38.227 ; 166.497,43.815 169.672,43.815
  lines w1: 171.857,33.238 174.879,36.26 ; 172.277,38.8 174.879,38.8 ; 172.339,43.88 174.879,41.34